# Altium PCB STM32F105 Devlopment Board.PcbDoc (part 1 of 2)
Units mm, origin at the board's own origin, x right, y up, seen from the top; angles counter-clockwise.
Board outline 85.07 x 64.6 mm, 4 copper layers (Signal, Int1 (GND), Int2 (PWR), GND), stack 1.371 mm thick; 98 components, 96 nets, 423 pads, 352 vias.
Unrouted connection lines stored in the file: 251.
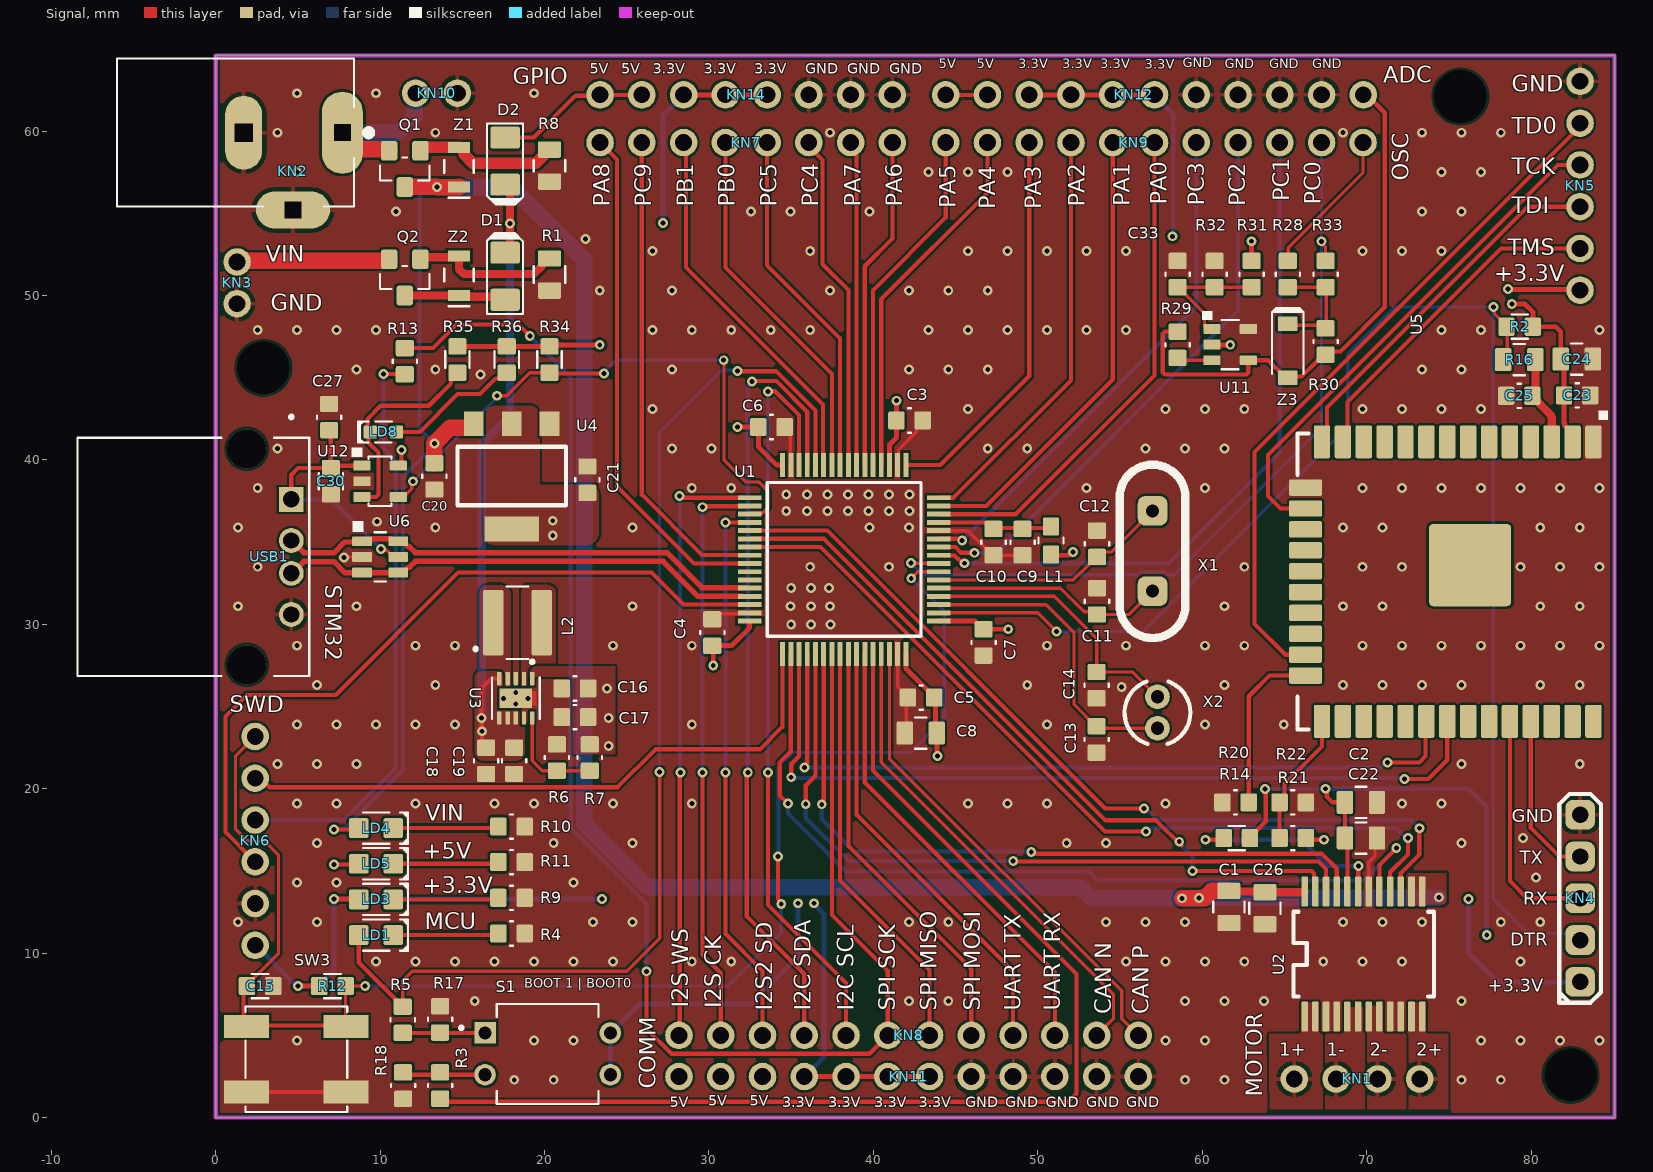
[diagram p0: Signal view]
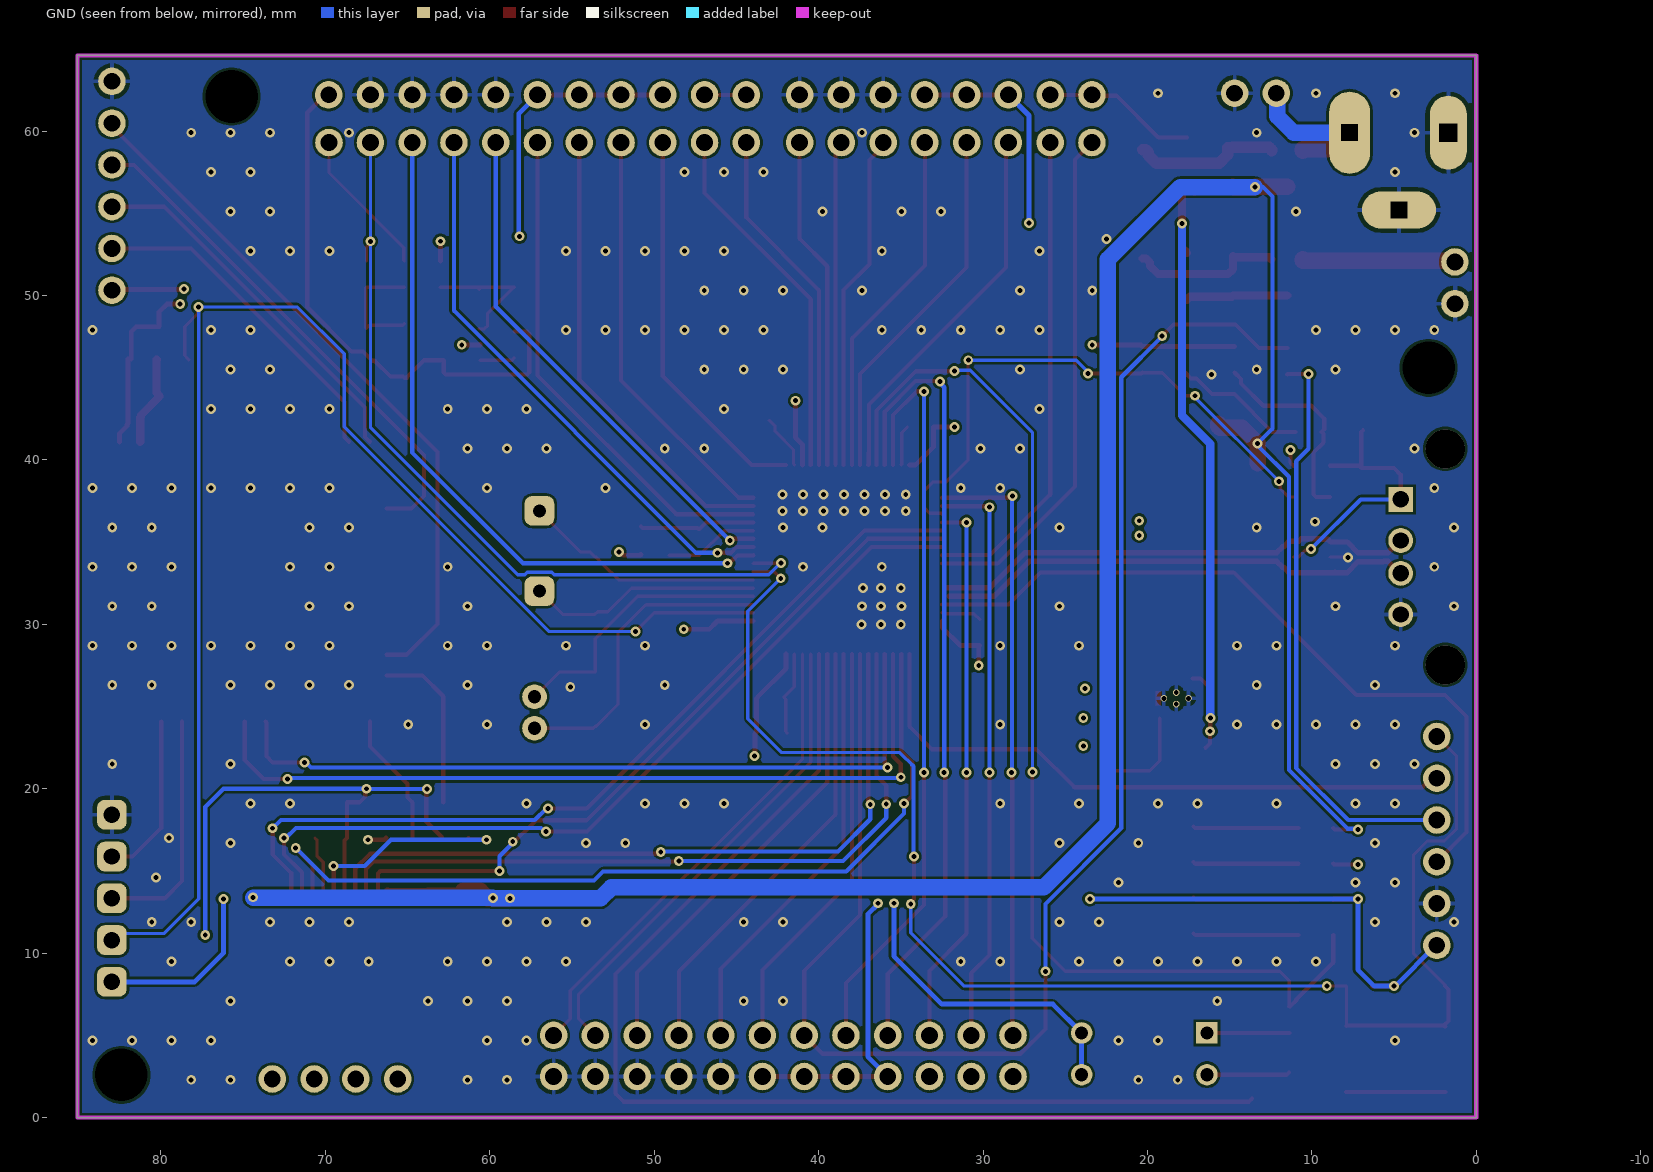
[diagram p1: GND view, seen from below]
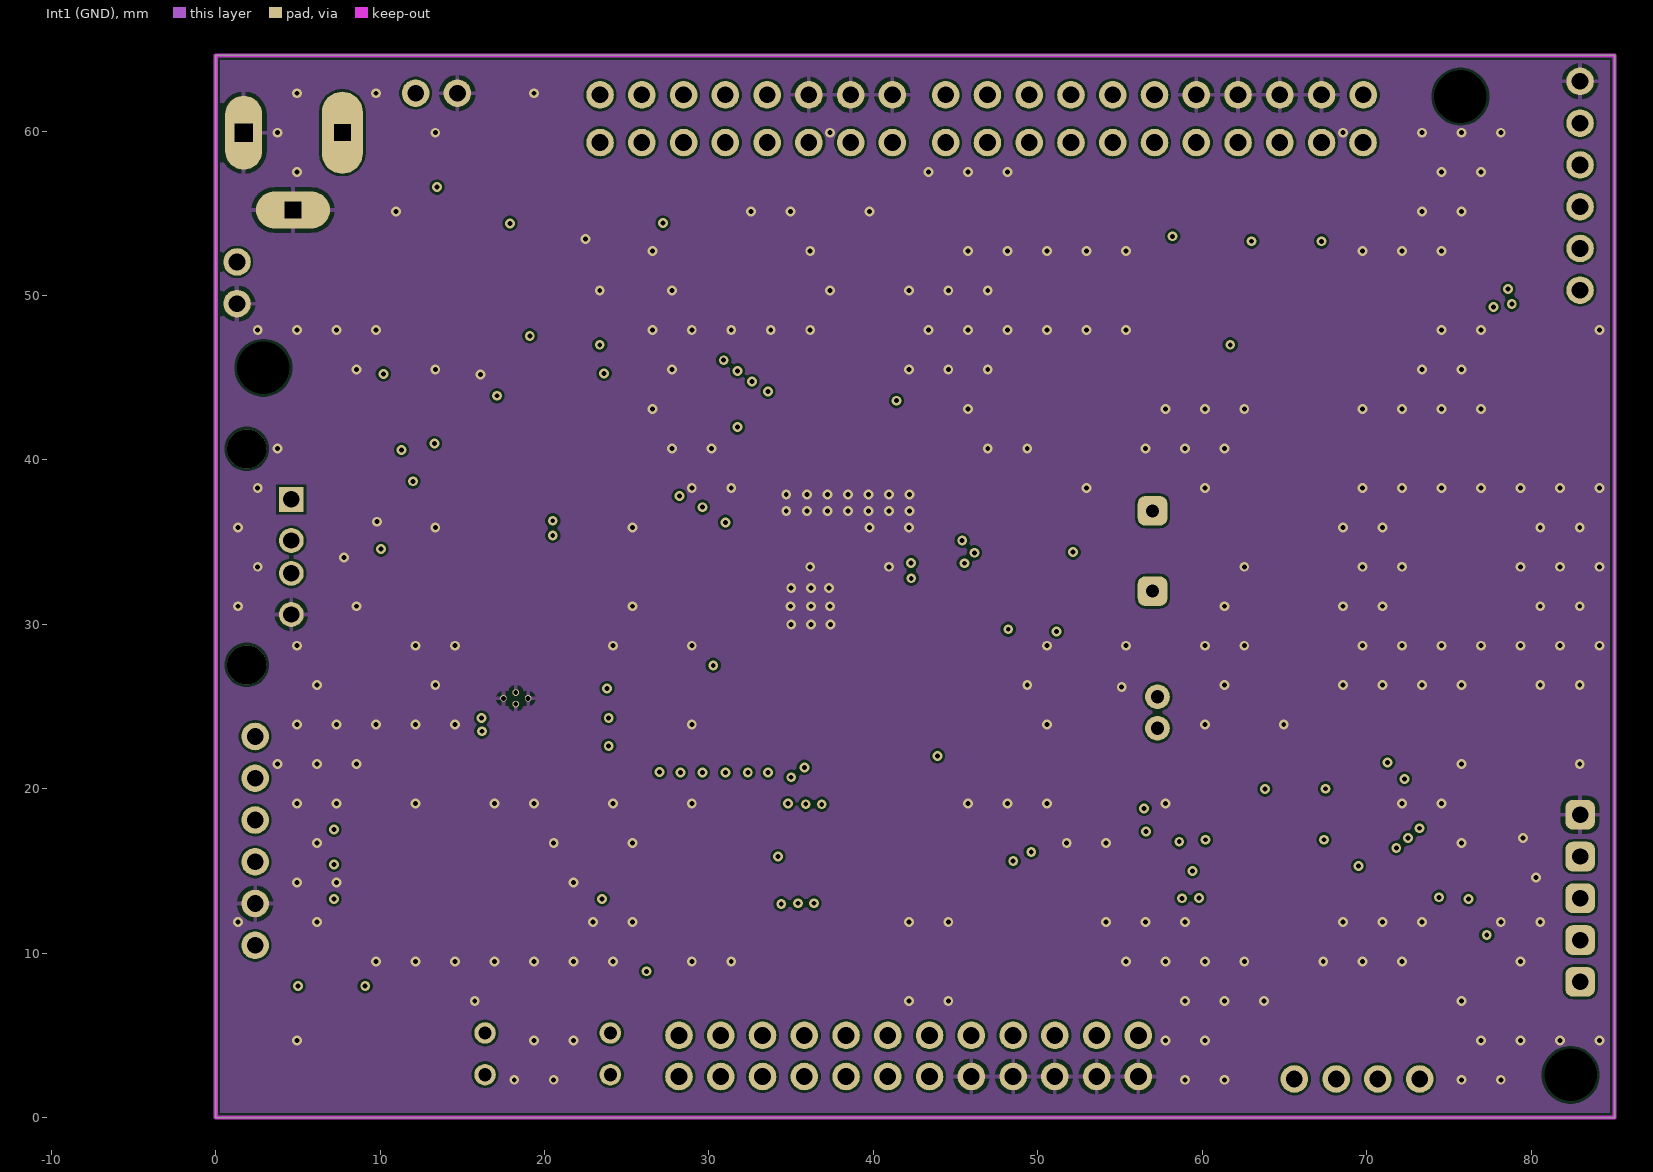
[diagram p2: Int1 (GND)]
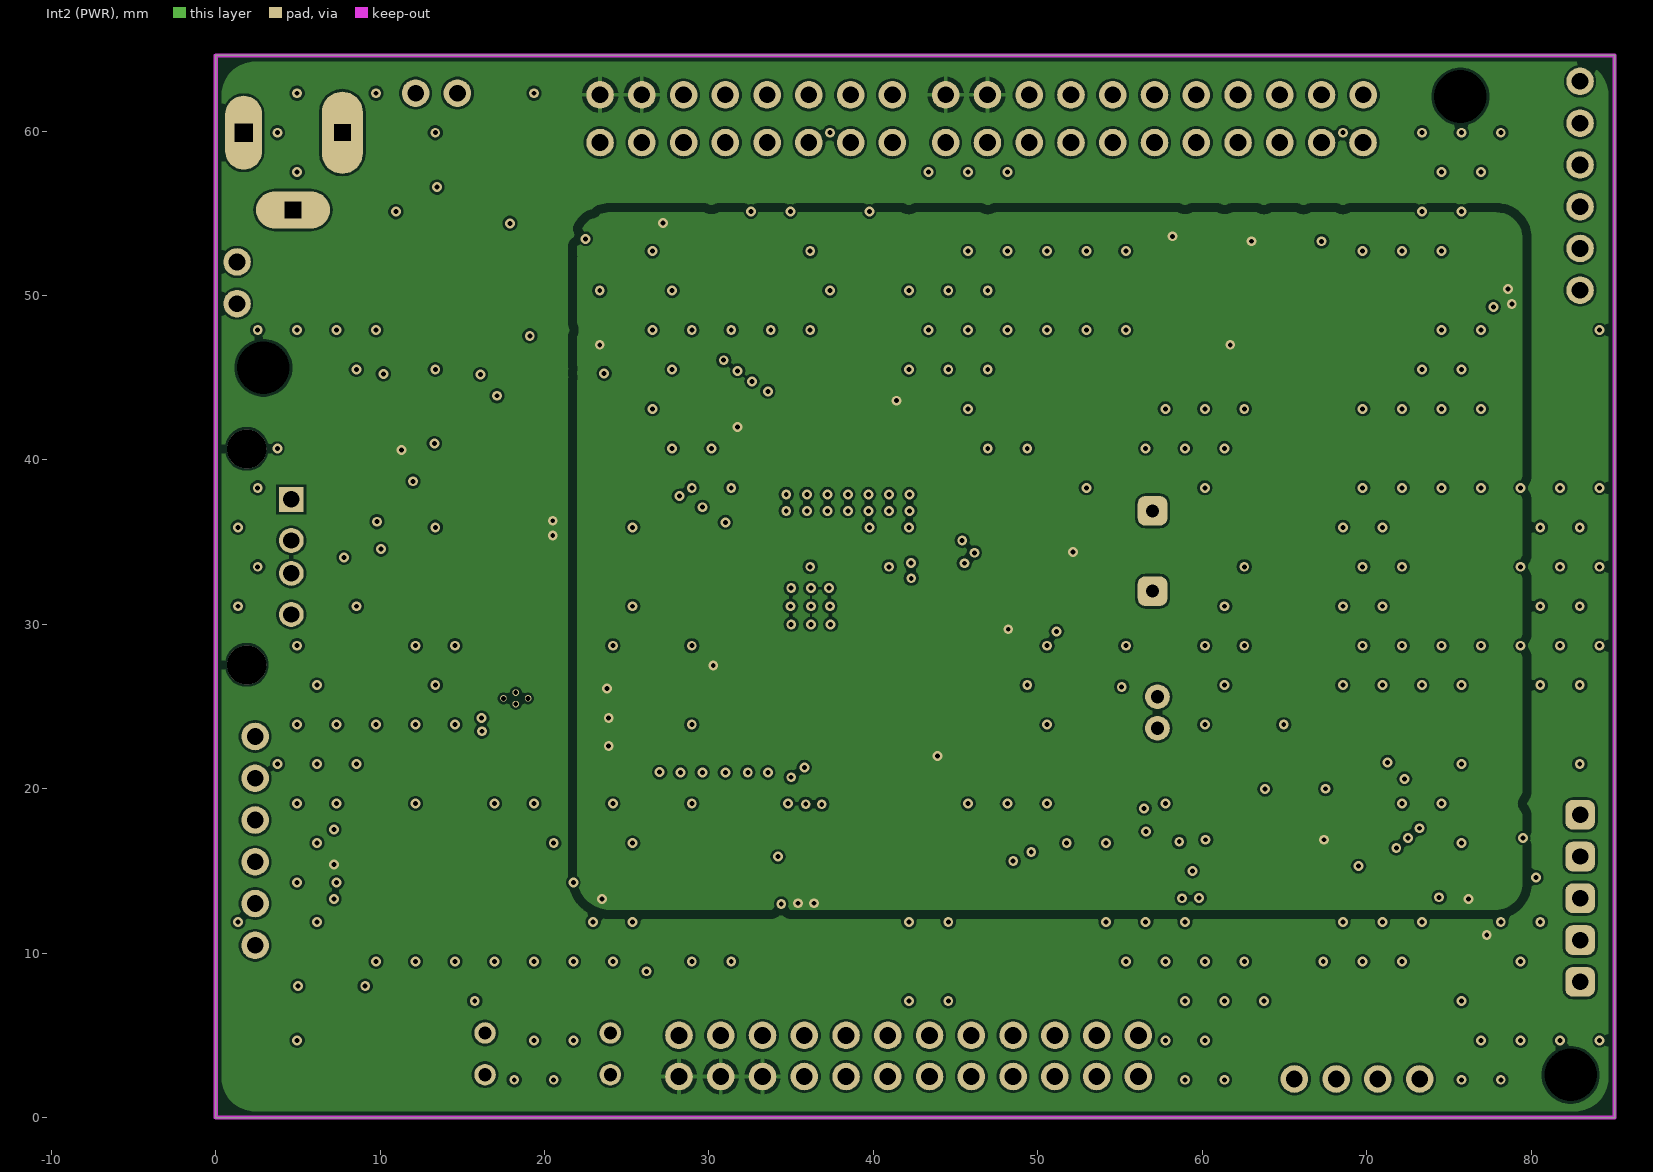
[diagram p3: Int2 (PWR)]
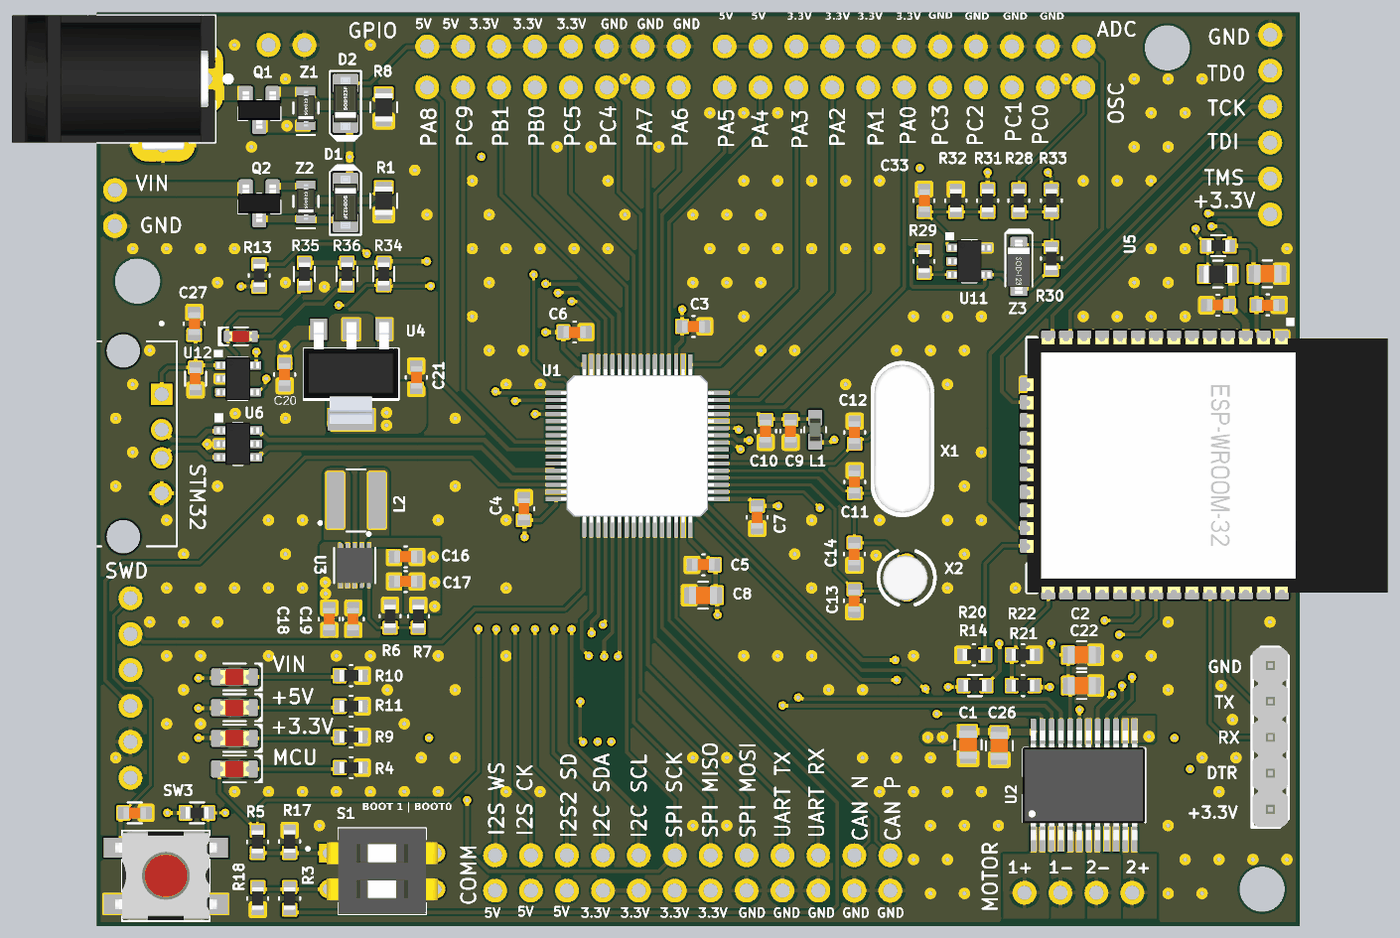
[diagram p5: 3D render of the assembled board from above, using the file's embedded part models]

## Layer stack, top to bottom
Top Solder: solder mask 0.025, SM-001, Dk 4
Signal: signal copper 0.035
Dielectric 1: prepreg 0.13, PP-017, Dk 4.3
Dielectric 2: prepreg 0.13, PP-017, Dk 4.3
Int1 (GND): signal copper 0.035
Dielectric 3: core 0.711, Core-039, Dk 4.8
Int2 (PWR): signal copper 0.035
Dielectric 4: prepreg 0.13, PP-017, Dk 4.3
Dielectric 5: prepreg 0.13, PP-017, Dk 4.3
GND: signal copper 0.035
Bottom Solder: solder mask 0.025, SM-001, Dk 4

## Board outline
0,0 0,64.6 85.075,64.6 85.075,0

## Design rules (kind name [scope] priority, off if disabled: settings)
BoardOutlineClearance [All] p1 off: gap=0.254 ignorepadtopadclearanceinfootprint=FALSE except(0: Arc-SplitContinuation Track-SplitContinuation SMDPad-SplitContinuation THPad-SplitContinuation Via-SplitContinuation Fill-SplitContinuation Poly-SplitContinuation Region-SplitContinuation Text-SplitContinuation; 1: Track-OutlineEdge SMDPad-OutlineEdge THPad-OutlineEdge Via-OutlineEdge Poly-OutlineEdge Poly-CavityEdge Region-OutlineEdge)
Clearance "POWER POLYS" [InNamedPolygon('+3.3V') vs InNamedPolygon('+5V POUR')] p1: gap=0.55 ignorepadtopadclearanceinfootprint=TRUE
Clearance MCU_Pad [IsPad AND InComponent('U2') vs IsTrack] p2: gap=0 ignorepadtopadclearanceinfootprint=TRUE
Clearance Communication [InNetClass('Communication') vs ALL AND NOT ((InComponent('U2') AND IsPad))] p3 off: gap=0.5 ignorepadtopadclearanceinfootprint=TRUE
Clearance USB_Clearance [InDifferentialPair('USB') vs ALL AND NOT (InNetClass('USB')OR InNet('GND') OR InComponentClass('USB')OR InNet('+5V') OR InNet('SWDIO'))] p4 off: gap=1 ignorepadtopadclearanceinfootprint=TRUE
Clearance ANALOG-ANALOG [InNetClass('ANALOG') vs InNetClass('ANALOG')] p5 off: gap=0.5 ignorepadtopadclearanceinfootprint=TRUE
Clearance ANALOG-Digital [InNetClass('ANALOG') vs NOT InNetClass('ANALOG')] p6 off: gap=1 ignorepadtopadclearanceinfootprint=TRUE
Clearance VIAS [IsVia vs IsVia OR IsPad OR OnLayer('Top Overlay')] p7: gap=0.2 ignorepadtopadclearanceinfootprint=TRUE
Clearance "General Clearance" [All] p8: gap=0.15 ignorepadtopadclearanceinfootprint=TRUE
DiffPairsRouting CAN_BUS [InDifferentialPair('CAN')] p1: maxlimit=0.3 minlimit=0.3 mostfreqgap=0.3 toplayer_minwidth=0.2 toplayer_maxwidth=0.2 toplayer_prefwidth=0.2 bottomlayer_minwidth=0.2 bottomlayer_maxwidth=0.2 bottomlayer_prefwidth=0.2 impedanceprofiledriven=TRUE impedanceprofileid={CE70A744-6239-4F9E-B3F5-3CA4833C3486} impedanceprofilevalue=120.000000 maxuncoupledlength=12.7
DiffPairsRouting USB_PAIR [InDifferentialPair('USB') OR InDifferentialPair('ESP_USB')] p2: maxlimit=0.2 minlimit=0.2 mostfreqgap=0.2 toplayer_minwidth=0.331 toplayer_maxwidth=0.331 toplayer_prefwidth=0.331 bottomlayer_minwidth=0.331 bottomlayer_maxwidth=0.331 bottomlayer_prefwidth=0.331 impedanceprofiledriven=TRUE impedanceprofileid={CFB3644E-55AA-453F-8CA4-D68C40BF7FC4} impedanceprofilevalue=90.000000 maxuncoupledlength=12.7
HoleSize [All] p1: absolutevalues=TRUE maxlimit=4 minlimit=0.3 maxpercent=80.000 minpercent=20.000
MinimumSolderMaskSliver [All] p1: minsoldermaskwidth=0.075
PlaneClearance [All] p1: clearance=0.7
PolygonConnect PolygonConnect_1 [IsThruPin] p1: connectstyle=Relief reliefconductorwidth=0.254 reliefentries=4 polygonreliefangle="90 Angle" airgapwidth=0.254
PolygonConnect [All] p2: connectstyle=Direct reliefconductorwidth=0.254 reliefentries=4 polygonreliefangle="90 Angle" airgapwidth=0.254
RoomDefinition Buck_Converter [InComponentClass('Buck_Converter')] p1: confinementstyle=ConfineIn formatcopy=TRUE lockcomponents=FALSE outline 10.555,57.8 20.255,57.8 20.255,61.5 10.555,61.5
RoomDefinition Status_Led [InComponentClass('Status_Led')] p2: confinementstyle=ConfineIn formatcopy=TRUE lockcomponents=FALSE outline 8.255,10.9 11.755,10.9 11.755,21.2 8.255,21.2
RoomDefinition ESP32 [InComponentClass('ESP32')] p3: confinementstyle=ConfineIn formatcopy=TRUE lockcomponents=FALSE outline 70.455,-1.7 91.955,-1.7 91.955,64.2 70.455,64.2
RoomDefinition 3.3V_Regulator [InComponentClass('3.3V_Regulator')] p4: confinementstyle=ConfineIn formatcopy=TRUE lockcomponents=FALSE outline 18.055,11.1 27.555,11.1 27.555,24.5 18.055,24.5
RoomDefinition MCU [InComponentClass('MCU')] p5: confinementstyle=ConfineIn formatcopy=TRUE lockcomponents=FALSE outline 35.155,20.3 65.055,20.3 65.055,42 35.155,42
RoomDefinition Motor_Driver [InComponentClass('Motor_Driver')] p6: confinementstyle=ConfineIn formatcopy=TRUE lockcomponents=FALSE outline 56.955,0.8 71.355,0.8 71.355,20.6 56.955,20.6
RoomDefinition V_IN_Reverse_Volt_Prot [InComponentClass('V_IN_Reverse_Volt_Prot')] p7: confinementstyle=ConfineIn formatcopy=TRUE lockcomponents=FALSE outline 7.155,50.6 18.055,50.6 18.055,54.7 7.155,54.7
RoomDefinition USB [InComponentClass('USB')] p8: confinementstyle=ConfineIn formatcopy=TRUE lockcomponents=FALSE outline -1.145,23 11.855,23 11.855,34.7 -1.145,34.7
RoomDefinition MCU_Control [InComponentClass('MCU_Control')] p9: confinementstyle=ConfineIn formatcopy=TRUE lockcomponents=FALSE outline 0.055,-0.2 26.055,-0.2 26.055,9.2 0.055,9.2
RoutingVias [All] p1: holewidth=0.3 width=0.6 viastyle="Through Hole" minholewidth=0.3 minwidth=0.4 maxholewidth=1 maxwidth=1
SilkToSolderMaskClearance [IsVia] p1: minsilkscreentomaskgap=0.2 clearancetoexposedcopper=TRUE
SolderMaskExpansion [All] p1: expansion=0.102 istentingtop=FALSE
SupplyNets "Schematic Supply Nets_6" [InNet('3V_REG_IN')] p1: voltage=0.000
SupplyNets "Schematic Supply Nets_5" [InNet('+5V')] p2: voltage=0.000
SupplyNets "Schematic Supply Nets_3" [InNet('+3.3V')] p3: voltage=0.000
SupplyNets "Schematic Supply Nets_2" [InNet('+3.3VA')] p4: voltage=0.000
SupplyNets "Schematic Supply Nets_1" [InNet('V_IN')] p5: voltage=0.000
SupplyNets "Schematic Supply Nets" [InNet('GND')] p6: voltage=0.000
Width "Power Traces" [InNetClass('POWER')] p1: maxlimit=5 minlimit=0.2 preferedwidth=0.5
Width [All] p2: maxlimit=1 minlimit=0.2 preferedwidth=0.254
25 further rules are at their usual default settings.

## Classes and differential pairs
component class Oscilloscope: C33 R28 R29 R30 R31 R32 R33 U11 Z3
component class ESP32: C23 C24 C25 KN5 R16 R20 R21 R22
differential pair class USB: USB
net class MCU_Control: BOOT0 BOOT1 ESP_EN HSE_IN HSE_OUT LSE_IN LSE_OUT NRST SWCLK SWDIO SWO
component class V_IN_Reverse_Volt_Prot: Q1 Q2 R1 R8 Z1 Z2
component class Buck_Converter: C20 C21
net class USB: USB_ID USB_N USB_P VBUS
net class POWER: +3.3V +3.3VA +5V V_IN
net class "MOTOR CONTROL": "DC MOTOR +1" "DC MOTOR +2" "DC MOTOR -1" "DC MOTOR -2" "Motor Driver EN1" "Motor Driver EN2" "Motor Driver IN1" "Motor Driver IN2" "Motor Driver IN3" "Motor Driver IN4"
net class GPIO: PA6 PA7 PA8 PA9 PA10 PA11 PA12 PA13 PA14 PB0 PB1 PB8 PB9 PC9 PC14 PC15 PD0 PD1 PD3 PD4 PD5 PD6 PD7 PD8 PD9 PD10 PD11 PD12 PD13 PD14 PD15
net class Communication: CAN_N CAN_P PB3 PB4 PB5 PB6 PB7 PB10 PB11 PB12 PB13 PB15
net class ANALOG: PA0 PA1 PA2 PA3 PA4 PA5 PC0 PC1 PC2 PC3
component class USB: U6
component class Motor_Driver: C1 C2 C22 C26 KN1 U2
component class MCU: C3 C4 C5 C6 C7 C8 C9 C10 C11 C12 C13 C14 L1 U1 X1 X2
component class MCU_Control: R3 R5 R12 R17 R18 S1 SW3
component class Status_Led: LD8
component class 3.3V_Regulator: C16 C17 C18 C19 L2 R6 R7 U3
differential pair CAN: +CAN_P -CAN_N
differential pair USB: +USB_P -USB_N

## Components (designator, comment, footprint, x,y, rotation, side; value= is the part's Value field where it differs from the comment)
C1 "10uF" C0805 61.612,12.813 r90 top
C2 "10uF" C0805 69.65,19.175 r180 top
C3 "100nF" C0603 42.2,42.4 r180 top
C4 "100nF" C0603 30.2,29.5 r270 top
C5 "100nF" C0603 42.9,25.54 r0 top
C6 "100nF" C0603 33.8,42 r180 top
C7 "100nF" C0603 46.7,28.9 r90 top
C8 "10uF 16V" C0805 42.875,23.39 r0 top
C9 "100nF 25V" C0603 49.077,35 r90 top
C10 "1uF 16V" C0603 47.3,35 r90 top
C11 "=Value" C0603 53.6,31.4 r90 top
C12 "=Value" C0603 53.6,34.9 r90 top
C13 "5p6F" C0603 53.575,23 r90 top
C14 "5p6F" C0603 53.575,26.3 r90 top
C15 "100NF 25V" C0603 2.7,8 r180 top
C16 "10uF" C0603 21.85,26.1 r0 top value="10UF 10V"
C17 "10uF" C0603 21.85,24.358 r0 top value="10UF 10V"
C18 "10uF X7R" C0603 16.45,21.7 r90 top value="10UF 25V"
C19 "0.1uF X7R" C0603 18.15,21.7 r90 top value="10uF 50V"
C20 "220NF 50V" C0603 13.3,39 r90 top
C21 "100NF" C0603 22.6,38.8 r270 top value="100NF 25V"
C22 "100nF" C0805 69.65,17 r180 top
C23 "100nF" C0603 82.8,43.925 r180 top
C24 "10uF" C0805 82.775,46.125 r180 top
C25 "1UF 16V" C0603 79.275,43.9 r0 top
C26 "100nF" C0805 63.812,12.738 r90 top
C27 "100NF 25V" C0603 6.9,42.6 r270 top
C30 "100NF 25V" C0603 7,38.7 r90 top
C33 "1UF 25V" C0603 58.5,51.3 r270 top
D1 "SMD22PL MCC" SOD123F 17.6,52.6 r270 top value=NRVTS260ESFT1G
D2 "SMD22PL MCC" SOD123F 17.6,56.74 r90 top value=NRVTS260ESFT1G
KN1 "4 Pin 2.54mm Header" "4 PIN MOTOR DRIVER" 73.22,2.35 r180 top
KN2 "DC Jack" "POWER JACK" 1.2,59.9 r180 top value="POWER JACK"
KN3 "2 Pin 2.54mm Header" "2-PIN Connector" 1.3,52.04 r270 top value=22_03_5025
KN4 "2211DI-05G-180" 87937_5 82.975,8.26 r90 top
KN5 "6 PIN 2.54mm Header" "6 PIN ESP32 SPI CONNECTOR" 82.975,63.02 r270 top
KN6 "6 Pin 2.54mm Header" "Programming Connector" 2.4,23.18 r270 top value=191906
KN7 "8 Pin 2.54mm Header" "PIN 33-48" 23.375,59.3 r0 top
KN8 "ADC INPUT PINS + DAC" "ADC_DAC CONNECTOR" 28.175,5 r0 top
KN9 "10 PIN 2.54mm HEADER" "10 PIN HEADER" 67.255,59.3 r180 top
KN10 "2 Pin 2.54mm Header" "2-PIN Connector" 12.16,62.3 r0 top value=22_03_5025
KN11 "ADC INPUT PINS + DAC" "ADC_DAC CONNECTOR" 28.175,2.5 r0 top
KN12 "10 PIN 2.54mm HEADER" "10 PIN HEADER" 44.395,62.2 r0 top
KN14 "8 Pin 2.54mm Header" "PIN 33-48" 23.375,62.2 r0 top
L1 "Ferrite Bead" L0603 50.8,34.148 r90 top
L2 "1.5uH" LPH4018 18.35,30.1 r0 top value="4u7H %20 1A7"
LD1 "17-21/R6C-AP1Q2L/3T RED" "LED0805 RED" 9.754,11.1 r180 top
LD3 "17-21/R6C-AP1Q2L/3T RED" "LED0805 RED" 9.754,13.27 r180 top
LD4 "17-21/R6C-AP1Q2L/3T RED" "LED0805 RED" 9.754,17.61 r180 top
LD5 "17-21/R6C-AP1Q2L/3T RED" "LED0805 RED" 9.754,15.44 r180 top
LD8 "19-21/R7C-AN2Q1B/3T" "LED0603 RED" 10.2,41.7 r0 top
Q1 "BSS84 FAIR-DIODES" SOT23 11.5,57.7 r180 top
Q2 "BSS84 FAIR-DIODES" SOT23 11.5,51.1 r180 top
R1 "20K %5" R0805 20.3,51.275 r90 top
R2 "33K %5" R0603 79.3,48.1 r0 top
R3 "1K %5" R0603 13.65,1.95 r90 top
R4 "1K %5" R0603 17.995,11.2 r180 top
R5 "1K %5" R0603 11.375,5.95 r270 top
R6 "100K" R0603 20.75,21.9 r270 top value="200K %1"
R7 "560K" R0603 22.75,21.9 r90 top value="560K %1"
R8 "20K %5" R0805 20.3,57.9 r90 top
R9 "1K %5" R0603 17.995,13.37 r180 top
R10 "1K %5" R0603 17.995,17.7 r180 top
R11 "1K %5" R0603 17.995,15.54 r180 top
R12 "10K %5" R0603 7.1,8 r180 top
R13 "0R %5" R0603 11.5,46 r270 top
R14 "10K %1" R0603 62.1,17 r0 top
R16 "10K %5" R0805 79.275,46.1 r180 top
R17 "10K %5" R0603 13.65,5.975 r270 top
R18 "10K %5" R0603 11.4,1.95 r90 top
R20 "10K %5" R0603 62.025,19.175 r180 top
R21 "10K %5" R0603 65.5,17 r0 top
R22 "10K %5" R0603 65.5,19.175 r0 top
R28 "910K %1" R0603 65.2,51.3 r90 top
R29 "0R %5" R0603 58.5,47 r270 top
R30 "15K %1" R0603 67.5,47.2 r90 top
R31 "100K %1" R0603 63,51.3 r90 top
R32 "100K %1" R0603 60.75,51.3 r270 top
R33 "0R %5" R0603 67.5,51.3 r270 top
R34 "33K %5" R0603 20.3,46.1 r270 top
R35 "33K %5" R0603 14.7,46.1 r270 top
R36 "1K %5" R0603 17.7,46.1 r270 top
S1 "DUAL SPST" SW_DS04-254-2L-02BK 20.19,3.88 r0 top
SW3 "260GF" DTSL61R 4.9,3.55 r90 top
U1 "STM32F105" QFP50P1200X1200X160-64N 38.225,33.95 r180 top locked
U2 "TB6612FNG" SSOP24 69.8,9.95 r90 top
U3 "TPS63030DSKR" SON50P250X250X80-11N 18.25,25.5 r270 top
U4 "AP1117EG-13" SOT223 18,42.2 r180 top
U5 "ESP32-WROOM-32D" ESPWROOM32D 83.79,41.1 r270 top
U6 "USBLC6-2SC6" "SOT23 6_2" 8.9,35.05 r270 top value=BS801C
U11 "LMV321" "SOT23 5" 60.597,47.962 r270 top
U12 "STMPS2151STR" "SOT23 5" 8.9,39.65 r270 top
USB1 "USB-A1HSW6" OST_USB-A1HSW6 1.89,34.1 r270 top
X1 "8MHz" HC49U 56.975,32.02 r90 top
X2 "32.768 kHz Crystal" MTF32 57.275,23.68 r90 top
Z1 "10V 200mW" SOD323 14.8,56.6 r90 top
Z2 "10V 200mW" SOD323 14.8,50 r90 top
Z3 "3V6 1/2W %2" SOD123 65.2,48.277 r270 top

## Footprints (in the part's own frame and the unit in brackets; to place one, negate y for a bottom-side part, rotate by r counter-clockwise, add the part's x,y. Pads: shape width x height; smd on the part's side, far side on the other; paste and mask are expansions set on the pad)
"2-PIN Connector" [mil]
  round 66 hole 40 mask+0.39: 1(0,0) 2(100,0)
"4 PIN MOTOR DRIVER" [mil]
  round 66 hole 40 mask+0.39: 1(0,0) 2(100,0) 3(200,0) 4(300,0)
"6 PIN ESP32 SPI CONNECTOR" [mil]
  round 66 hole 40 mask+0.39: 1(0,0) 2(100,0) 3(200,0) 4(300,0) 5(400,0) 6(500,0)
"10 PIN HEADER" [mil]
  round 66 hole 40 mask+0.39: 1(0,0) 2(100,0) 3(200,0) 4(300,0) 5(400,0) 6(500,0) 7(600,0) 8(700,0) 9(800,0) 10(900,0)
87937_5 [mm]
  rrect50% 1.8x1.8 hole 1: 1(0,0) 2(2.54,0) 3(5.08,0) 4(7.62,0) 5(10.16,0)
  silkscreen extent -1.27,-1.27 11.43,1.27, body extent -1.27,-1.25 11.43,1.26, height 15.02
"ADC_DAC CONNECTOR" [mil]
  round 66 hole 40 mask+0.39: 1(0,0) 2(100,0) 3(200,0) 4(300,0) 5(400,0) 6(500,0) 7(600,0) 8(700,0) 9(800,0) 10(900,0) 11(1000,0) 12(1100,0)
C0603 [mm]
  rrect20% 1x1.1 smd paste-0.102: 1(-0.8,0) 2(0.8,0)
  silkscreen extent -0.09,-0.74 0.09,0.74, body extent -0.8,-0.38 0.8,0.42, height 0.5
C0805 [mm]
  rrect20% 1x1.4 smd paste-0.127: 1(-0.975,0) 2(0.975,0)
  silkscreen extent -0.34,-0.95 0.34,0.95, body extent -1,-0.63 1,0.63, height 0.6
DTSL61R [mm]
  rect 1.4x2.75 smd: 1(-2,-3.025) 2(2,-3.025) 3(-2,3.025) 4(2,3.025)
  silkscreen extent -3.2,-3.1 3.2,3.1, body extent -3.15,-3.6 3.15,3.6, height 2.5
ESPWROOM32D [mm]
  rrect20% 2x1 smd: 1(0,0) 2(0,-1.27) 3(0,-2.54) 4(0,-3.81) 5(0,-5.08) 6(0,-6.35) 7(0,-7.62) 8(0,-8.89) 9(0,-10.16) 10(0,-11.43) 11(0,-12.7) 12(0,-13.97) 13(0,-15.24) 14(0,-16.51) 25(17,-16.51) 26(17,-15.24) 27(17,-13.97) 28(17,-12.7) 29(17,-11.43) 30(17,-10.16) 31(17,-8.89) 32(17,-7.62) 33(17,-6.35) 34(17,-5.08) 35(17,-3.81) 36(17,-2.54) 37(17,-1.27) 38(17,0)
  rrect20% 1x2 smd: 15(2.785,-17.51) 16(4.055,-17.51) 17(5.325,-17.51) 18(6.595,-17.51) 19(7.865,-17.51) 20(9.135,-17.51) 21(10.405,-17.51) 22(11.675,-17.51) 23(12.945,-17.51) 24(14.215,-17.51)
  rrect20% 2x2 smd: 39(6.125,-8.875) 39(6.125,-6.125) 39(8.875,-8.875) 39(8.875,-6.125)
  rrect10% 5x5 smd paste-300 mask-300: 39(7.5,-7.5)
  silkscreen extent -1.91,-18 17.5,0.89, body extent -0.5,-18.05 17.57,7.49, height 3
HC49U [mm]
  rrect50% 1.8x1.8 hole 0.8: 1(0,0) 2(4.88,0)
  silkscreen extent -2.85,-2 7.69,2, body extent -3.05,-2.25 7.93,2.25, height 3.6
L0603 [mm]
  rrect20% 1.1x1 smd: 1(0.102,0) 2(1.803,0)
  silkscreen extent 0.77,-0.76 1.13,0.76, body extent 0.15,-0.4 1.75,0.4, height 0.45
"LED0603 RED" [mm]
  rrect20% 0.8x0.8 smd: 1(-0.8,0) 2(0.8,0)
  silkscreen extent -1.56,-0.64 0.51,0.63, body extent -0.81,-0.4 0.81,0.4, height 0.6
"LED0805 RED" [mm]
  rrect20% 1.2x1.2 smd: 1(-1.05,0) 2(1.05,0)
  silkscreen extent -1.93,-0.95 0.8,0.95, body extent -1.01,-0.62 1.01,0.62, height 1.1
LPH4018 [mm]
  rrect20% 1.25x4 smd: 1(-1.475,0) 2(1.475,0)
  silkscreen extent -2.64,-2.2 0.67,2.2, body extent -2.1,-2.1 2.1,2.1, height 1.8
MTF32 [mm]
  round 1.5 hole 0.8: 1(0,0) 2(1.92,0)
  silkscreen extent -0.96,-2 2.84,2, body extent -0.67,-1.5 2.53,1.7, height 8.27
OST_USB-A1HSW6 [mm]
  rect 1.508x1.508 hole 1: 1(-3.5,2.71)
  round 1.508 hole 1: 2(-1,2.71) 3(1,2.71) 4(3.5,2.71)
  round 2.38 hole 2.38 unplated: ""(-6.57,0) ""(6.57,0)
  silkscreen extent -8.61,-10.3 7.25,3.8
"PIN 33-48" [mil] "9 pin header for pins 33-48"
  round 66 hole 40 mask+0.39: 1(0,0) 2(100,0) 3(200,0) 4(300,0) 5(400,0) 6(500,0) 7(600,0) 8(700,0)
"POWER JACK" [mm]
  oval 2.5x5 hole 1 square: 1(-6.5,0)
  oval 2.25x4.5 hole 1.1 square: 2(-0.5,0)
  oval 4.5x2.25 hole 1 square: 3(-3.5,4.7)
  silkscreen extent -8.3,-4.5 7.2,4.5, body extent -7.2,-4.5 7.2,5, height 11
"Programming Connector" [mil] "6 pin programming connector"
  round 66 hole 40 mask+0.39: 1(0,0) 2(100,0) 3(200,0) 4(300,0) 5(400,0) 6(500,0)
QFP50P1200X1200X160-64N [mm]
  rect 1.45x0.3 smd mask+0.05: 1(-5.75,3.75) 2(-5.75,3.25) 3(-5.75,2.75) 4(-5.75,2.25) 5(-5.75,1.75) 6(-5.75,1.25) 7(-5.75,0.75) 8(-5.75,0.25) 9(-5.75,-0.25) 10(-5.75,-0.75) 11(-5.75,-1.25) 12(-5.75,-1.75) 13(-5.75,-2.25) 14(-5.75,-2.75) 15(-5.75,-3.25) 16(-5.75,-3.75) 33(5.75,-3.75) 34(5.75,-3.25) 35(5.75,-2.75) 36(5.75,-2.25) 37(5.75,-1.75) 38(5.75,-1.25) 39(5.75,-0.75) 40(5.75,-0.25) 41(5.75,0.25) 42(5.75,0.75) 43(5.75,1.25) 44(5.75,1.75) 45(5.75,2.25) 46(5.75,2.75) 47(5.75,3.25) 48(5.75,3.75)
  rect 0.3x1.45 smd mask+0.05: 17(-3.75,-5.75) 18(-3.25,-5.75) 19(-2.75,-5.75) 20(-2.25,-5.75) 21(-1.75,-5.75) 22(-1.25,-5.75) 23(-0.75,-5.75) 24(-0.25,-5.75) 25(0.25,-5.75) 26(0.75,-5.75) 27(1.25,-5.75) 28(1.75,-5.75) 29(2.25,-5.75) 30(2.75,-5.75) 31(3.25,-5.75) 32(3.75,-5.75) 49(3.75,5.75) 50(3.25,5.75) 51(2.75,5.75) 52(2.25,5.75) 53(1.75,5.75) 54(1.25,5.75) 55(0.75,5.75) 56(0.25,5.75) 57(-0.25,5.75) 58(-0.75,5.75) 59(-1.25,5.75) 60(-1.75,5.75) 61(-2.25,5.75) 62(-2.75,5.75) 63(-3.25,5.75) 64(-3.75,5.75)
  silkscreen extent -4.67,-4.67 4.67,4.67, body extent -6,-6 6,6, height 0.72
R0603 [mm]
  rrect20% 1x1.1 smd paste-0.102: 1(-0.8,0) 2(0.8,0)
  silkscreen extent -0.5,-0.74 0.5,0.74, body extent -0.8,-0.4 0.8,0.4, height 0.4
R0805 [mm]
  rrect20% 1x1.4 smd paste-0.127: 1(-0.975,0) 2(0.975,0)
  silkscreen extent -0.5,-0.95 0.5,0.95, body extent -1,-0.63 1,0.63, height 0.5
SOD123 [mm]
  rrect20% 0.9x1.2 smd: 1(0,0) 2(3.277,0)
  silkscreen extent -0.97,-0.95 3.05,0.95, body extent -0.27,-0.85 3.58,0.85, height 1.42
SOD123F [mm]
  rrect20% 1.34x1.8 smd: 1(0,0) 2(2.86,0)
  silkscreen extent -1.2,-1.1 3.72,1.1, body extent -0.46,-0.85 3.29,0.85, height 1.2
SOD323 [mm]
  rect 0.65x1.35 smd: 1(0,0) 2(2.4,0)
  silkscreen extent -0.66,-0.89 1.62,0.89, body extent -0.05,-0.63 2.45,0.62, height 0.95
SON50P250X250X80-11N [mm]
  rrect25% 0.81x0.27 smd mask+0.05: 1(-1.2,1) 2(-1.2,0.5) 3(-1.2,0) 4(-1.2,-0.5) 5(-1.2,-1) 6(1.2,-1) 7(1.2,-0.5) 8(1.2,0) 9(1.2,0.5) 10(1.2,1)
  rect 1.2x2 smd paste-2 mask+0.05: 11(0,0)
  round 0.4 hole 0.3 mask+0: 12(0.35,0) 13(-0.35,0) 14(0,0.75) 15(0,-0.75)
  silkscreen extent -2.32,-1.46 1.25,1.46, body extent -1.25,-1.25 1.25,1.25, height 0.75
SOT23 [mm]
  rrect30% 1x1.2 smd: 1(-0.95,-1.1) 2(0.95,-1.1) 3(0,1.1)
  silkscreen extent -1.5,-0.7 1.5,0.7, body extent -1.5,-1.32 1.5,1.32, height 1.08
"SOT23 5" [mm]
  rrect20% 0.6x1.05 smd paste-0.025: 1(0,0) 2(0.95,0) 3(1.9,0)
  rrect20% 0.6x1.05 smd: 4(1.9,2.2) 5(0,2.2)
  silkscreen extent -1.08,-0.61 2.45,1.62, body extent -0.55,-0.4 2.45,2.6, height 1.44
"SOT23 6_2" [mm]
  rrect20% 0.6x1.2 smd: 1(0,0) 2(0.95,0) 3(1.9,0) 4(1.9,2.2) 5(0.95,2.2) 6(0,2.2)
  silkscreen extent -1.21,-0.57 2.45,1.45, body extent -0.55,-0.4 2.45,2.6, height 1.44
SOT223 [mm]
  rect 1.2x1.5 smd: 1(-2.3,0) 2(0,0) 3(2.3,0)
  rect 3.3x1.5 smd: 4(0,6.4)
  silkscreen extent -3.3,1.4 3.3,4.95, body extent -3.32,-0.5 3.38,6.7, height 1.86
SSOP24 [mm]
  rrect20% 1.8x0.4 smd mask+0.05: 1(-3.8,3.575) 2(-3.8,2.925) 3(-3.8,2.275) 4(-3.8,1.625) 5(-3.8,0.975) 6(-3.8,0.325) 7(-3.8,-0.325) 8(-3.8,-0.975) 9(-3.8,-1.625) 10(-3.8,-2.275) 11(-3.8,-2.925) 12(-3.8,-3.575) 13(3.8,-3.575) 14(3.8,-2.925) 15(3.8,-2.275) 16(3.8,-1.625) 17(3.8,-0.975) 18(3.8,-0.325) 19(3.8,0.325) 20(3.8,0.975) 21(3.8,1.625) 22(3.8,2.275) 23(3.8,2.925) 24(3.8,3.575)
  silkscreen extent -2.58,-4.3 2.58,4.25, body extent -3.95,-4.31 3.95,4.32, height 1.78
SW_DS04-254-2L-02BK [mm]
  rect 1.308x1.308 / inner round 1.308 / far side rect 1.308x1.308 hole 0.8: 1A(-3.81,1.27)
  round 1.308 hole 0.8: 1B(3.81,1.27) 2A(-3.81,-1.27) 2B(3.81,-1.27)
  silkscreen extent -5.35,-3.04 3.1,3.04, body extent -3.94,-3.05 3.93,3.03, height 3.09

## Part data
C1 C2 C22 C26: library part "C0805 1UF 16V %10 X7R", ClassName=Motor_Driver, Malzeme Tanımı="CAP 0805 CER 1u 16V%10 X7R", Part Number="C0805 1UF 16V %10 X7R", SAPStokKodu=1200920233, Siparis Kodu=CS2012X7R105K160NRE
C3 C4 C5 C6 C7 C9 C15 C21 C23 C27 C30: library part "C0603 100NF 25V %10 X7R", Malzeme Tanımı="CAP 0603 CER 100n 25V%10 X7R", Part Number="C0603 100NF 25V %10 X7R", SAPStokKodu=1200920254
  C3 C4 C5 C6 C7 C9: ClassName=MCU, Siparis Kodu=06033C104KAT2A
  C15 C30: Siparis Kodu=0603B104K250CT
  C21: ClassName=Buck_Converter, Siparis Kodu=06033C104KAT2A
  C23: ClassName=ESP32, Siparis Kodu=06033C104KAT2A
  C27: Siparis Kodu=06033C104KAT2A
C8 C24: library part "C0805 10UF 16V %10 X7R", Defined by=MK, Malzeme Tanımı="CAP 0805 CER 10UF 16V %10 X7R", Part Number="C0805 10UF 16V %10 X7R", SAPStokKodu=1200920687, Siparis Kodu=CC0805KKX7R7BB106
  C8: ClassName=MCU
  C24: ClassName=ESP32
C10 C25: library part "C0603 1UF 16V %10 X7R", Malzeme Tanımı="CAP 0603 CER 1u 16V%10 X7R", Part Number="C0603 1UF 16V %10 X7R", SAPStokKodu=1200920367, Siparis Kodu=0603YC105KAT2A
  C10: ClassName=MCU
  C25: ClassName=ESP32
C11 C12: library part "C0603 8PF 50V %10", ClassName=MCU, Malzeme Tanımı="CAP 0603 CER 8pF 50V %10 COG", Part Number="C0603 8PF 50V %10", SAPStokKodu=1200920607, Siparis Kodu=CC0603DRNPO9BN8R0
C13 C14: library part "C0603 15PF 25V %10 COG", ClassName=MCU, Malzeme Tanımı="CAP 0603 CER 15p 25V%10 COG", Part Number="C0603 15PF 25V %10 COG", SAPStokKodu=1200920269, Siparis Kodu=06033A150KAT2A
C16 C17: library part "C0603 10UF 10V %20 X6S", ClassName=3.3V_Regulator, Malzeme Tanımı="CAP 0603 CER 10u 10V%20 X6S", Part Number="C0603 10UF 10V %20 X6S", SAPStokKodu=1200920512, Siparis Kodu=0603S106M100/EOL
C18: library part "C0603 10UF 25V %10 X5R", ClassName=3.3V_Regulator, Malzeme Tanımı="CAP 0603 CER 10u 25V %20 X5R", Part Number="C0603 10UF 25V %10 X5R", SAPStokKodu=1200920558, Siparis Kodu=0603X/106M250NT
C19: library part "0603 10uF 50V%10 X7R FLEX", ClassName=3.3V_Regulator, Defined by=MK, Malzeme Tanımı="CAP 0603 CER 10UF 50V%10 X7R FLEX", Part Number="0603 10uF 50V%10 X7R FLEX", SAPStokKodu=1200920778, Siparis Kodu=SH18B106K500CT
C20: library part "C0603 220NF 50V %10 X7R", ClassName=Buck_Converter, Malzeme Tanımı="CAP 0603 CER 220n 50V%10 X7R", Part Number="C0603 220NF 50V %10 X7R", SAPStokKodu=1200920550, Siparis Kodu=CS1608X7R224K500NRB
C33: library part "C0603 1UF 25V %10X7R", Malzeme Tanımı="CAP 0603 1UF 25V %10 X7R", Part Number="C0603 1UF 25V %10X7R", SAPStokKodu=1200920567, Siparis Kodu=VJ0603Y105KXXCW1BC, Uretici=SAMSUNG
D1 D2: library part NRVTS260ESFT1G, Part Number=SMD22PL, Defined by=MK, Malzeme Tanımı="DIODE SCHOTTKY 60V 2A SOD123FL AG", SAPStokKodu=1200560019, Siparis Kodu=NRVTS2H60ESFT1G
KN1: library part "MOTOR DRIVER", ClassName=Motor_Driver
KN2: library part PJ-102A, Defined by=MK, Malzeme Tanımı="KONN. DC POWER JACK 2.0mm 2.5A", Part Number=PJ-102A, SAPStokKodu=1200951323, Siparis Kodu=PJ-102A
KN3 KN10: library part 22_03_5025, Malzeme Tanımı="KONN SPOX 2LI ERKEK 2.50mm", Part Number=22_03_5025, SAPStokKodu=1200950245, Siparis Kodu=YMW025-02R
KN5: library part "6 PIN ESP32 SPI", ClassName=ESP32
KN6: library part 191906, Defined by=MK, Malzeme Tanımı="KONN 2.50mm 6’LI KABLO 7cm", Part Number=191906, SAPStokKodu=1200951442, Siparis Kodu=302-401006
KN7 KN14: library part "PIN 33-48"
KN8 KN11: library part ADC
KN9 KN12: library part "10 PIN HEADER"
L1: library part "L0603 33NH 0A3", ClassName=MCU, Part Number="L0603 33NH 0A3"
L2: library part "LPH4018T 4u7H %20 1A7", ClassName=3.3V_Regulator, Defined by=MK, Malzeme Tanımı="IND SMD 4.7uH 1.7A %20", Part Number="LPH4018T 4u7H %20 1A7", SAPStokKodu=1200940650, Siparis Kodu=CSME0418D-4R7M-LRH
Q1 Q2: "P-Channel MOSFET", ClassName=V_IN_Reverse_Volt_Prot, Defined by=MK, Malzeme Tanımı="TRANS PMOSFET SM50V 130mA Sot23 760mA", Part Number="BSS84 FAIR-DIODES", SAPStokKodu=1200980898, Siparis Kodu=BSS84
R1 R8: library part "R0805 20K %5 1/8W", ClassName=V_IN_Reverse_Volt_Prot, Malzeme Tanımı="RES 0805 20K %5 1/8W", Part Number="R0805 20K %5 1/8W", SAPStokKodu=1200970239, Siparis Kodu=CRCW080520K0JNEA
R2 R34 R35: library part "R0603 33K %5 1/10W", Malzeme Tanımı="RES 0603 33K %5 1/10W", Part Number="R0603 33K %5 1/10W", SAPStokKodu=1200970569, Siparis Kodu=RC1608J333CS
R3 R4 R5 R9 R10 R11 R36: library part "R0603 1K %5 1/10W", Malzeme Tanımı="RES 0603 1K %5 1/10W", Part Number="R0603 1K %5 1/10W", SAPStokKodu=1200970522, Siparis Kodu=FCF03JT102
  R3 R5: ClassName=MCU_Control
R6: library part "R0603 200K %1 1/10W", ClassName=3.3V_Regulator, Datasheet Link=https://www.mouser.com.tr/datasheet/2/1365/1-3044649.pdf, Defined by=MK, Malzeme Tanımı="RES 0603 200K %1 1/10W", Part Number="R0603 200K %1 1/10W", SAPStokKodu=1200971360, Siparis Kodu=CRCW0603200KFKEA, Uretici="ROYAL OHM"
R7: library part "R0603 560K %1 1/10W", ClassName=3.3V_Regulator, Defined by=MK, Part Number="R0603 560K %1 1/10W"
R12 R17 R18 R20 R21 R22: library part "R0603 10K %5 1/10W", Malzeme Tanımı="RES 0603 10K %5 1/10W", Part Number="R0603 10K %5 1/10W", SAPStokKodu=1200970518, Siparis Kodu=MCR03EZPJ103
  R12 R17 R18: ClassName=MCU_Control
  R20 R21 R22: ClassName=ESP32
R13 R29 R33: library part "R0603 0R %5 1/10W", Malzeme Tanımı="RES 0603 0R %5 1/10W", Part Number="R0603 0R %5 1/10W", SAPStokKodu=1200970528, Siparis Kodu=MCR03EZPJ000
R14: library part "R0603 10K %1 1/10W", Malzeme Tanımı="RES 0603 10K %1 1/10W", Part Number="R0603 10K %1 1/10W", SAPStokKodu=1200970746, Siparis Kodu=ACR0603T1002F(10K)
R16: library part "R0805 10K %5 1/8W", ClassName=ESP32, Malzeme Tanımı="RES 0805 10K %5 1/8W", Part Number="R0805 10K %5 1/8W", SAPStokKodu=1200970124, Siparis Kodu="WR08X103 JTL"
R28: library part "R0603 910K %1 1/10W", Malzeme Tanımı="RES 0603 910K %1 1/10W", Part Number="R0603 910K %1 1/10W", SAPStokKodu=1200970965, Siparis Kodu=ERJ3EKF9103V
R30: library part "R0603 15K %1 1/10W", Malzeme Tanımı="RES 0603 15K %1 1/10W", Part Number="R0603 15K %1 1/10W", SAPStokKodu=1200970843, Siparis Kodu=FCF03FT1502
R31 R32: library part "R0603 100K %1 1/10W", Malzeme Tanımı="RES 0603 100K %1 1/10W", Part Number="R0603 100K %1 1/10W", SAPStokKodu=1200970803, Siparis Kodu=FCF03FT1003
S1: library part DS04-254-2L-02BK, "2 Position, Through Hole, 2.54 mm Pitch, Flat Slide Actuator, Flat Bottom, Long Pin, DIP Switch", Package=None, Check_prices=https://www.snapeda.com/parts/DS04-254-2L-02BK/Same+Sky/view-part/?ref=eda, ClassName=MCU_Control, MF="Same Sky", MP=DS04-254-2L-02BK, SnapEDA_Link=https://www.snapeda.com/parts/DS04-254-2L-02BK/Same+Sky/view-part/?ref=snap
SW3: library part DTSL61R, ClassName=MCU_Control, Malzeme Tanımı="ANAH. SM TACT VERT 260GF 6x6x2.5mm", Part Number=DTSL61R, SAPStokKodu=1200910021, Siparis Kodu=DTSL61-R-V-T/R
U1: library part STM32F103R8T6, "ARMÂ® CortexÂ®-M3 STM32F1 Microcontroller IC 32-Bit 72MHz 64KB (64K x 8) FLASH 64-LQFP (10x10)", Package="LQFP-64 STMicroelectronics", Availability="In Stock", Check_prices=https://www.snapeda.com/parts/STM32F103R8T6/STMicroelectronics/view-part/?ref=eda, ClassName=MCU, MF=STMicroelectronics, MP=STM32F103R8T6, Price=None, Purchase-URL=https://pricing.snapeda.com/search/part/STM32F103R8T6/?ref=eda, SnapEDA_Link=https://www.snapeda.com/parts/STM32F103R8T6/STMicroelectronics/view-part/?ref=snap
U2: "- Motor Driver Power MOSFET Parallel 24-SSOP", Package=None, Check_prices=https://www.snapeda.com/parts/TB6612FNG/Toshiba/view-part/?ref=eda, ClassName=Motor_Driver, MF=Toshiba, MP=TB6612FNG, SnapEDA_Link=https://www.snapeda.com/parts/TB6612FNG/Toshiba/view-part/?ref=snap
U3: "High Efficient Single Inductor Buck-Boost Converter with 1-A Switches", Package="WSON-10 Texas Instruments", Check_prices=https://www.snapeda.com/parts/TPS63030DSKR/Texas+Instruments/view-part/?ref=eda, ClassName=3.3V_Regulator, MF="Texas Instruments", MP=TPS63030DSKR, SnapEDA_Link=https://www.snapeda.com/parts/TPS63030DSKR/Texas+Instruments/view-part/?ref=snap
U6: library part BS801C, "USB ESD PROTECTION IC", ClassName=USB, Datasheet Link=https://cdn.ozdisan.com/ETicaret_Dosya/350715_6815717.pdf, Part Number=BS801C, Uretici=Holtek
U11: library part "LMV321 SOT23-5_", Malzeme Tanımı="IC OPAMP SM LMV321AS5X JANUS", Part Number="LMV321 SOT23-5_", SAPStokKodu=1200980663, Siparis Kodu=LMV321
USB1: Package=None, Availability=Unavailable, MF="{'manufacturer': u'On Shore Technology Inc.'}", MP=USB-A1HSW6, Price=None
X1: library part HC-49U, ClassName=MCU, Malzeme Tanımı="XTAL TH 10MHz LOW PROFILE", Part Number=HC-49U, SAPStokKodu=1200990008, Siparis Kodu=US0982F
X2: library part Q_0.032768_MTF32_12.5_20, ClassName=MCU, Malzeme Tanımı="XTAL TH 32.768kHz 12.5pF 20ppm 70C", Part Number=Q_0.032768_MTF32_12.5_20, SAPStokKodu=1200990009, Siparis Kodu=Q0.032768-MTF32-12.5-20-LF
Z1 Z2: library part "BZT52B10S 10V 200mW", ClassName=V_IN_Reverse_Volt_Prot, Datasheet Link=https://diotec.com/request/datasheet/mm3z2v4.pdf, Defined by=MK, Malzeme Tanımı="DIODE ZENER SM 10V 200mW %2", Part Number="BZT52B10S 10V 200mW", SAPStokKodu=1200981463, Siparis Kodu=BZT52B10S, Uretici=GOODARK
Z3: library part "MMSZ52 3V6 1/2W %2", Malzeme Tanımı="DIODE ZENER SM 3V6 1/2W %2", Part Number="MMSZ52 3V6 1/2W %2", SAPStokKodu=1200980646, Siparis Kodu=BZT52B3V6-E3-08
KN4: Part Number=2211DI-05G-180
LD1 LD3 LD4 LD5: Malzeme Tanımı="LED 0805 RED 45-112mcd 632nm AlInGaP", Part Number="17-21/R6C-AP1Q2L/3T RED", SAPStokKodu=1200960277, Siparis Kodu=17-21/R6C-AP1Q2L/TR8(ARC)
LD8: ClassName=Status_Led, Malzeme Tanımı="LED 0603 RED 90-112mcd 625-645nm", Part Number=19-21/R7C-AN2Q1B/3T, SAPStokKodu=1200960141, Siparis Kodu=LTST-C190KRKT-AK
U4: Part Number=AP1117EG-13
U5: Malzeme Tanımı="IC ESP32 WIFI+BT SMD MODUL", Part Number=ESP32-WROOM-32D, SAPStokKodu=1200980800, Siparis Kodu=ESP32-WROOM-32D-M113DH6400PH3Q1
U12: Datasheet Link=https://www.st.com/content/ccc/resource/technical/document/datasheet/e8/d7/48/25/eb/87/45/b3/CD00167470.pdf/files/CD00167470.pdf/jcr:content/translations/en.CD00167470.pdf, Defined by=MK, Part Number=STMPS2151STR, Uretici=STMicroelectronics

## Free pads (board coordinates)
  round 0 hole 3.2 unplated: 4(2.9,45.6) 4(75.7,62.1) 4(82.4,2.6)
  round 1.676 hole 1.016 mask+0.01: 6(69.795,62.2) 7(69.775,59.3)

## Via types
v1: diameter 0.6, hole 0.3, Signal to GND, 352 vias

## Nets (pads, with @x,y where several pads share a name; then routed paths per layer and width w, separated by ;. In a path a pad name is that pad's centre, name@x,y a point inside that pad or via, vN(x,y) a via of type N, cw(c..) or ccw(c..) an arc to the next point about the centre after c; other vN are vias at no path point)
3V_REG_IN: C18.2 C19.2 D1.1 D2.1 U3.5 U3.6 U3.7 U3.8 | length 40.9
  Signal w0.254: v1(16.174,24.3) 16.182,24.292 16.182,23.507 v1(16.189,23.5) 16.189,22.761 C18.2@16.45,22.5 ; v1(16.174,24.3) 16.174,26.089 16.785,26.7 U3.5@17.25,26.7
  Signal w0.5: D2.1@17.13,56.32 17.532,56.722 D2.1@17.618,56.722 ; D1.1@17.6,52.6 17.894,52.894 v1(17.894,54.386) 17.894,56.446 D2.1@17.618,56.722 ; D2.1@17.6,56.74 D2.1@17.618,56.722
  GND w0.5: v1(16.174,24.3) 16.174,40.974 17.894,42.694 v1(17.894,54.386)
+3.3V: C3.2 C4.2 C5.2 C6.2 C7.2 C8.2 C16.2 C17.2 C23.2 C24.2 KN4.1 KN5.6 KN6.6 KN11.4 KN11.5 KN11.6 KN11.7 KN12.3 KN12.4 KN12.5 KN12.6 KN14.3 KN14.4 KN14.5 L1.1 LD3.2 R2.2 R7.2 R12.2 R21.2 R31.2 R34.1 R35.1 R36.1 S1.1B S1.2B U1.1 U1.19 U1.32 U1.48 U1.64 U3.1 U5.2 U11.2 | length 162.2
  Signal w0.3: v1(5,8) R12.2@6.3,8 ; v1(7.2,13.3) 8.674,13.3 LD3.2@8.704,13.27 ; R35.1@14.7,46.9 R36.1@17.7,46.9 R34.1@20.3,46.9 20.4,47 v1(23.357,47) ; KN14.3@28.455,62.2 KN14.4@30.995,62.2 KN14.5@33.535,62.2 ; v1(30.26,27.504) 30.26,28.64 C4.2@30.2,28.7 31.372,28.7 32.475,29.803 U1.48@32.475,30.2 ; v1(31.731,41.991) 32.991,41.991 C6.2@33,42 33,40.792 34.092,39.7 U1.32@34.475,39.7 ; KN11.4@35.795,2.5 KN11.5@38.335,2.5 KN11.6@40.875,2.5 KN11.7@43.415,2.5 ; U1.19@40.975,39.7 40.975,40.925 41.4,41.35 C3.2@41.4,42.4 v1(41.4,43.6) ; U1.64@41.975,28.2 41.975,27.315 43.7,25.59 C5.2@43.7,25.54 43.775,25.465 43.775,23.465 C8.2@43.85,23.39 43.875,23.365 43.875,22.025 v1(43.9,22) ; U1.1@43.975,30.2 46.15,30.2 46.65,29.7 v1(48.2,29.7) ; KN12.3@49.475,62.2 KN12.4@52.015,62.2 KN12.5@54.555,62.2 KN12.6@57.095,62.2 ; L1.1@50.8,34.25 50.85,34.2 51.875,34.2 52.064,34.389 v1(52.145,34.389) ; U11.2@60.597,47.012 60.597,47 v1(61.7,47) ; R31.2@63,52.1 v1(63,53.3) ; R21.2@66.3,17 66.4,16.9 v1(67.4,16.9) ; v1(78.587,50.39) 78.622,50.355 82.94,50.355 KN5.6@82.975,50.32 ; v1(78.824,49.476) 79.624,49.476 80.1,49 R2.2@80.1,48.1 81.5,48.1 81.8,47.8 C24.2@81.8,46.125 82,46.125 C23.2@82,43.925 82,42.216 82.05,42.166 82.05,42.07 82.52,41.6 U5.2@82.52,41.1
  GND w0.3: KN6.6@2.4,10.48 2.46,10.48 4.94,8 v1(5,8) 6.2,8 7.2,9 v1(7.2,13.3) v1(23.5,13.3) ; S1.2B@24,2.61 S1.1B@24,5.15 25.75,6.9 32.5,6.9 35.419,9.819 v1(35.419,13.036) ; v1(27.2,54.4) 27.2,60.945 KN14.3@28.455,62.2 ; KN11.4@35.795,2.5 37,3.705 37,12.373 36.39,12.983 v1(36.39,13.036) ; KN12.6@57.095,62.2 58.233,61.062 58.233,53.633 v1(58.2,53.6) ; v1(76.2,13.3) 76.2,10 77.94,8.26 KN4.1@82.975,8.26
  other v1: 23.9,22.6 23.9,24.3 23.8,26.1
+3.3VA: C9.2 C10.2 L1.2 U1.13 | length 7.1
  Signal w0.254: U1.13@43.977,36.202 46.848,36.202 47.25,35.8 C10.2@47.3,35.8 47.35,35.85 49.077,35.85 50.7,35.85 L1.2@50.8,35.95
+5V: C2.2 C21.2 C22.2 D2.2 KN11.1 KN11.2 KN11.3 KN12.1 KN12.2 KN14.1 KN14.2 LD5.2 R14.2 U2.20 U4.2 U4.4 U12.5 | length 46.9
  Signal w0.254: v1(7.2,15.4) 8.664,15.4 LD5.2@8.704,15.44 ; U12.5@11.1,39.65 11.127,39.65 11.3,39.823 v1(11.3,40.6) ; D2.2@17.6,59.6 19.342,59.6 21.894,62.151 23.326,62.151 KN14.1@23.375,62.2 KN14.2@25.915,62.2 ; KN12.1@44.395,62.2 KN12.2@46.935,62.2 ; R14.2@62.9,17 62.9,17.05 63.859,18.009 63.859,19.932 v1(63.814,19.977) ; v1(67.5,20) 67.566,19.934 67.566,19.534 67.925,19.175 C2.2@68.675,19.175 C22.2@68.675,17 68.825,16.85 U2.20@68.825,13.75
  GND w0.254: v1(63.814,19.977) 63.826,19.988 67.488,19.988 v1(67.5,20) 76.2,20 77.3,18.9 v1(77.3,11.1)
  other v1: 20.5,35.4 20.5,36.3
BOOT0: R3.1 U1.60 | length 70.9
  Signal w0.254: R3.1@13.65,1.15 13.83,0.97 51.87,0.97 52.356,1.456 52.356,8.732 46.111,14.978 39.975,21.113 U1.60@39.975,28.2
BOOT1: LD1.2 R5.1 U1.28 | length 69.8
  Signal w0.2: R5.1@11.375,6.75 11.375,8.325 11.95,8.9 25,8.9 27,10.9 v1@27,20.9
  Signal w0.254: LD1.2@8.704,11.1 8.704,9.421 10.952,7.173 10.952,7.123 11.325,6.75 R5.1@11.375,6.75 ; v1(31.74,45.415) 31.76,45.395 34.076,45.395 36.475,42.996 U1.28@36.475,39.7
  GND w0.2: v1(26.995,21.014) 26.995,41.668 30.775,45.448 31.707,45.448 v1(31.74,45.415)
CAN_N: KN8.11 U1.61 | length 29.5
  Signal w0.2: U1.61@40.475,28.2 40.475,21.625 54.595,7.505 54.595,6.02 KN8.11@53.575,5
CAN_P: KN8.12 U1.62 | length 29.5
  Signal w0.2: U1.62@40.975,28.2 40.975,21.832 55.095,7.712 55.095,6.02 KN8.12@56.115,5
"DC MOTOR +1": KN1.4 U2.1 U2.2
"DC MOTOR +2": KN1.1 U2.11 U2.12
"DC MOTOR -1": KN1.3 U2.5 U2.6
"DC MOTOR -2": KN1.2 U2.7 U2.8
ESP_BOOT0: R21.1 R22.1 U5.25 | length 8.2
  Signal w0.254: R21.1@64.7,17 R22.1@64.7,19.175 65,19.475 65,20.3 67.28,22.58 U5.25@67.28,24.1
ESP_BOOT2: R20.1 U5.24 | length 10.4
  Signal w0.254: R20.1@62.825,19.175 62.825,25.625 64.085,26.885 U5.24@66.28,26.885
ESP_EN: KN4.2 R2.1 R16.2 U1.2 | length 90.9
  Signal w0.2: U1.2@43.975,30.7 50,30.7 v1(51.132,29.568) ; v1(77.7,49.3) 77.777,49.223 77.777,48.873 78.55,48.1 78.55,46.35 R16.2@78.3,46.1
  GND w0.2: v1(51.132,29.568) 56.412,29.568 68.855,42.01 68.855,46.455 71.7,49.3 v1(77.7,49.3) 77.7,13.3 79.8,11.2 82.575,11.2 KN4.2@82.975,10.8
ESP_RX: KN4.3 U5.34 | length 14.4
  Signal w0.254: U5.34@78.71,24.1 78.71,14.39 79.76,13.34 KN4.3@82.975,13.34
ESP_ST_RX: U1.52 U5.30 | length 47.2
  Signal w0.254: v1(35.8,21.3) 35.8,21.394 35.975,21.569 U1.52@35.975,28.2 ; v1(71.272,21.6) 73.2,21.6 73.581,21.981 73.581,24.051 U5.30@73.63,24.1
  GND w0.254: v1(35.8,21.3) 70.879,21.3 71.179,21.6 v1(71.272,21.6)
ESP_ST_TX: U1.51 U5.31 | length 50.5
  Signal w0.254: v1(35,20.7) 35,21.5 35.475,21.975 U1.51@35.475,28.2 ; v1(72.3,20.6) 73.741,20.6 74.9,21.759 U5.31@74.9,24.1
  GND w0.254: v1(35,20.7) 35.05,20.65 72.25,20.65 v1(72.3,20.6)
ESP_TCK: KN5.3 U5.16 | length 31.4
  Signal w0.254: U5.16@66.28,37.045 64.755,37.045 64.001,37.799 64.001,40.301 81.64,57.94 KN5.3@82.975,57.94